# Altium PCB Bottom-PCB.PcbDoc
Units mm, origin at the board's own origin, x right, y up, seen from the top; angles counter-clockwise.
Board outline 55 x 80 mm, 2 copper layers (Top Layer, Bottom Layer); 20 components, 24 nets, 64 pads, 0 vias.
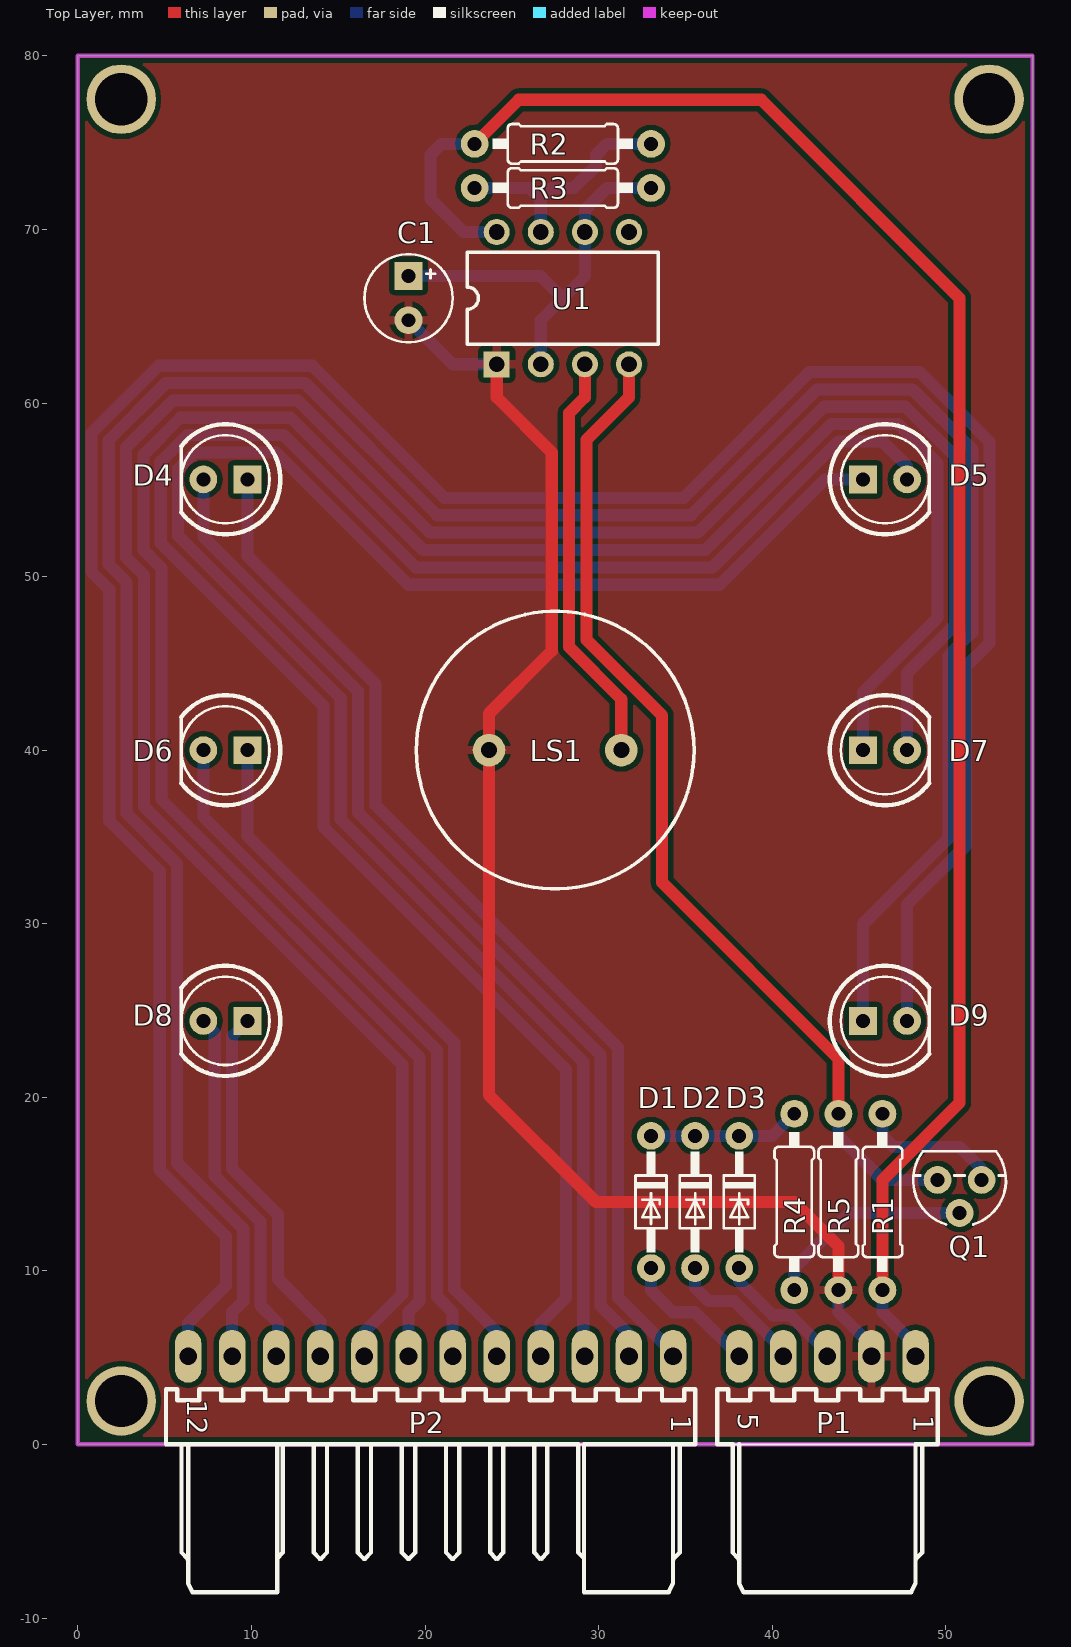
[diagram p0: Top Layer view]
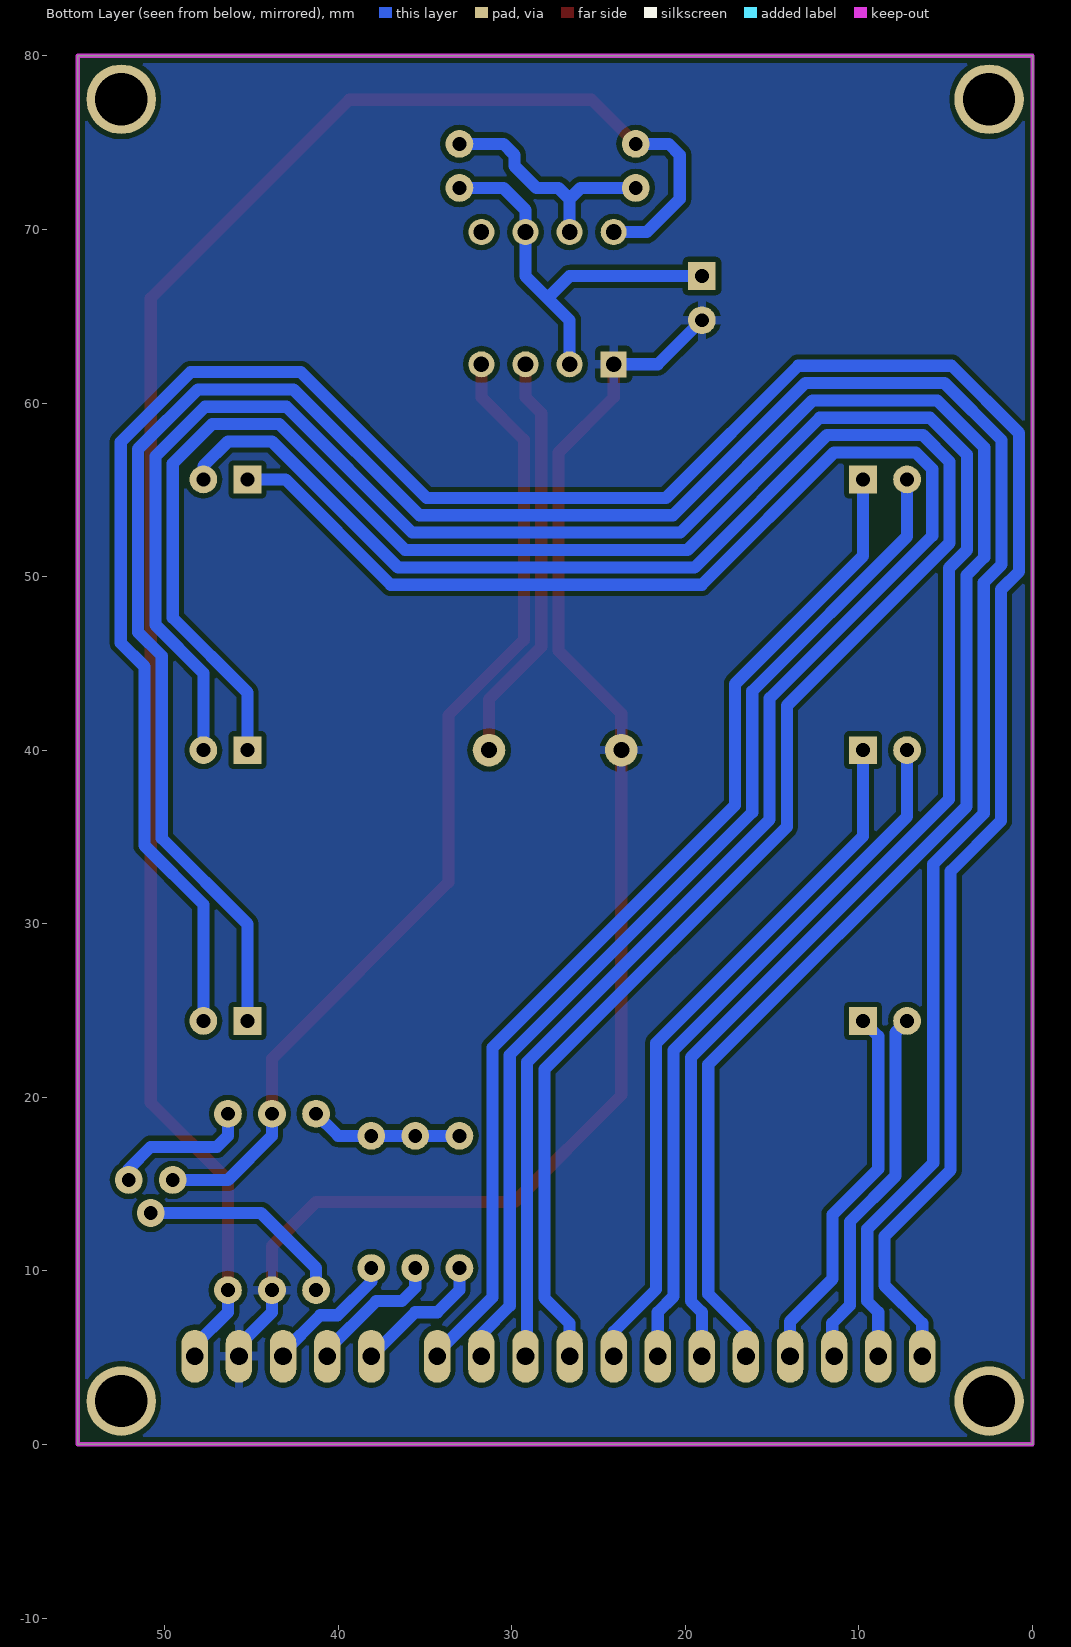
[diagram p1: Bottom Layer view, seen from below]

## Layer stack, top to bottom
Top Solder: solder mask 0.0102, Solder Resist, Dk 3.5
Top Layer: signal copper 0.0356
Dielectric 1: dielectric 0.32, FR-4, Dk 4.8
Bottom Layer: signal copper 0.0356
Bottom Solder: solder mask 0.0102, Solder Resist, Dk 3.5

## Board outline
0,0 55,0 55,80 0,80

## Design rules (kind name [scope] priority, off if disabled: settings)
Clearance Clearance_2 [InNamedPolygon('Bottom Layer-GND')] p1: gap=0.3 ignorepadtopadclearanceinfootprint=FALSE
Clearance Clearance_1 [InNamedPolygon('Top Layer-GND')] p2: gap=0.3 ignorepadtopadclearanceinfootprint=FALSE
Clearance [All] p3: gap=0.3 ignorepadtopadclearanceinfootprint=FALSE
ComponentClearance [All] p1: gap=0 collisioncheckmode=3 verticalgap=0 showdistances=FALSE
PolygonConnect PolygonConnect_2 [All vs IsNamedPolygon('Top Layer-GND')] p1: thpad.connectstyle=Relief thpad.reliefconductorwidth=0.5 thpad.reliefentries=4 thpad.polygonreliefangle="90 Angle" thpad.airgapwidth=0.3 smdpad.connectstyle=Relief smdpad.reliefconductorwidth=0.5 smdpad.reliefentries=4 smdpad.polygonreliefangle="90 Angle" smdpad.airgapwidth=0.3 via.connectstyle=Relief via.reliefconductorwidth=0.254 via.reliefentries=4 via.polygonreliefangle="90 Angle" via.airgapwidth=0.254
PolygonConnect PolygonConnect_1 [All vs IsNamedPolygon('Bottom Layer-GND')] p2: thpad.connectstyle=Relief thpad.reliefconductorwidth=0.5 thpad.reliefentries=4 thpad.polygonreliefangle="90 Angle" thpad.airgapwidth=0.3 smdpad.connectstyle=Relief smdpad.reliefconductorwidth=0.5 smdpad.reliefentries=4 smdpad.polygonreliefangle="90 Angle" smdpad.airgapwidth=0.3 via.connectstyle=Relief via.reliefconductorwidth=0.254 via.reliefentries=4 via.polygonreliefangle="90 Angle" via.airgapwidth=0.254
PolygonConnect [All] p3: connectstyle=Relief reliefconductorwidth=0.254 reliefentries=4 polygonreliefangle="90 Angle" airgapwidth=0.254
RoomDefinition Buzzer [InComponentClass('Buzzer')] p1: confinementstyle=ConfineIn formatcopy=TRUE lockcomponents=FALSE outline 0,-8.89 54.61,-8.89 54.61,80.01 0,80.01
RoutingVias [All] p1: holewidth=0.711 width=1.27 viastyle="Through Hole" minholewidth=0.711 minwidth=1.27 maxholewidth=0.711 maxwidth=1.27
SolderMaskExpansion [All] p1: expansion=0.102
Width [All] p1: maxlimit=1 minlimit=0.5 preferedwidth=0.7
29 further rules are at their usual default settings.

## Components (designator, comment, footprint, x,y, rotation, side; value= is the part's Value field where it differs from the comment)
C1 "10uF" E2,5-5 19.05,66.04 r270 top
D1 "1N4148" DO34Z7 33.02,13.97 r270 top
D2 "1N4148" DO34Z7 35.56,13.97 r270 top
D3 "1N4148" DO34Z7 38.1,13.97 r270 top
D4 "MACHINE_REJECT" LED5MM 8.5,55.6 r180 top
D5 "MACHINE_GOOD" LED5MM 46.5,55.6 r0 top
D6 "WRISTSTRAP_REJECT" LED5MM 8.5,40 r180 top
D7 "WRISTSTRAP_GOOD" LED5MM 46.5,40 r0 top
D8 "TABLE_REJECT" LED5MM 8.5,24.4 r180 top
D9 "TABLE_GOOD" LED5MM 46.5,24.4 r0 top
LS1 "Speaker" BUZZER-16MM 27.5,40 r0 top
P1 "Header 5" 7395-05 43.18,5.08 r0 top
P2 "Header 12" 7395-12 20.32,5.08 r0 top
Q1 "NPN" TO92 50.8,15.24 r180 top
R1 "3K9" 0207/10 46.355,13.97 r270 top
R2 "1K2" 0207/10 27.94,74.93 r180 top
R3 "100K" 0207/10 27.94,72.39 r180 top
R4 "50K" 0207/10 41.275,13.97 r270 top
R5 "1K" 0207/10 43.815,13.97 r90 top
U1 "NE555N" DIP8 27.94,66.04 r0 top

## Footprints (in the part's own frame and the unit in brackets; to place one, negate y for a bottom-side part, rotate by r counter-clockwise, add the part's x,y. Pads: shape width x height; smd on the part's side, far side on the other; paste and mask are expansions set on the pad)
0207/10 [mm]
  round 1.6 hole 0.8: 1(-5.08,0) 2(5.08,0)
  silkscreen extent -4.04,-1.14 4.04,1.14
7395-05 [mil]
  oval 60x120 hole 40: 1(200,0) 2(100,0) 3(0,0) 4(-100,0) 5(-200,0)
  silkscreen extent -250,-535 250,-75
7395-12 [mil]
  oval 60x120 hole 40: 1(550,0) 2(450,0) 3(350,0) 4(250,0) 5(150,0) 6(50,0) 7(-50,0) 8(-150,0) 9(-250,0) 10(-350,0) 11(-450,0) 12(-550,0)
  silkscreen extent -600,-535 600,-75
BUZZER-16MM [mil]
  round 74 hole 36: 1(150,0) 2(-150,0)
  silkscreen extent -315,-315 315,315
DIP8 [mm] "DIP; 8 Leads; Row Spacing 7.62 mm; Pitch 2.54 mm"
  rect 1.5x1.5 hole 0.9: 1(-3.81,-3.81)
  round 1.5 hole 0.9: 2(-1.27,-3.81) 3(1.27,-3.81) 4(3.81,-3.81) 5(3.81,3.81) 6(1.27,3.81) 7(-1.27,3.81) 8(-3.81,3.81)
  silkscreen extent -5.5,-2.65 5.5,2.65
DO34Z7 [mm]
  round 1.6 hole 0.8: 1(3.81,0) 2(-3.81,0)
  silkscreen extent -2.92,-0.89 2.92,0.89
E2,5-5 [mil]
  rect 63x63 hole 31.5: 1(-50,0)
  round 63 hole 31.5: 2(50,0)
  silkscreen extent -100,-100 100,100
LED5MM [mm]
  rect 1.6x1.6 hole 0.8: 1(-1.27,0)
  round 1.6 hole 0.8: 2(1.27,0)
  silkscreen extent -3.17,-3.17 2.54,3.17
TO92 [mm]
  round 1.6 hole 0.8: 1(-1.27,0) 2(0,1.905) 3(1.27,0)
  silkscreen extent -2.67,-1.65 2.68,2.57

## Part data
C1: library part "Cap Pol1", "Polarized Capacitor (Radial)", LatestRevisionDate=17-Jul-2002, LatestRevisionNote="Re-released for DXP Platform.", PackageDescription="Polarized Capacitor (Radial); 2 Leads", PackageReference=RB7.6-15, Published=8-Jun-2000, Publisher="Altium Limited"
D1 D2 D3: library part Diode, "Default Diode", Code_JEDEC=DO-214-AB, LatestRevisionDate=17-Jul-2002, LatestRevisionNote="Re-released for DXP Platform.", PackageDescription="DO-214-AB/SMC; 2 C-Bend Leads; Body 7.9 x 5.9 mm, inc. leads (LxW)", PackageReference=SMC, PackageVersion=Sep-1996, Published=8-Jun-2000, Publisher="Altium Limited"
D4 D5 D6 D7 D8 D9: library part LED0, "Typical INFRARED GaAs LED", LatestRevisionDate=08-Jul-2005, LatestRevisionNote="Mech Layer 1 removed.", PackageDescription="LED; 2 Leads", PackageReference=LED-0, Published=8-Jun-2000, Publisher="Altium Limited"
LS1: "Loudspeaker", LatestRevisionDate=17-Jul-2002, LatestRevisionNote="Re-released for DXP Platform.", PackageReference=PIN2, Published=24-Mar-1999, Publisher="Altium Limited"
P1: "Header, 5-Pin", LatestRevisionDate=17-Jul-2002, LatestRevisionNote="Re-released for DXP Platform.", Publisher="Altium Limited"
P2: "Header, 12-Pin", LatestRevisionDate=17-Jul-2002, LatestRevisionNote="Re-released for DXP Platform.", Publisher="Altium Limited"
Q1: "NPN Bipolar Transistor", Code_JEDEC=TO-226-AA, LatestRevisionDate=17-Jul-2002, LatestRevisionNote="Re-released for DXP Platform.", PackageDescription="TO, Flat Index; 3 In-Line, Axial Leads; Body Dia. 4.8mm; Leads 0.55 x 0.51 mm (max)", PackageReference=TO-226-AA, Published=8-Jun-2000, Publisher="Altium Limited"
R1 R2 R3 R4 R5: library part Res1, "Resistor", LatestRevisionDate=17-Jul-2002, LatestRevisionNote="Re-released for DXP Platform.", PackageDescription="Axial Device, Thru-Hole; 2 Leads; 0.3 in Pin Spacing", PackageReference=AXIAL-0.3, Published=8-Jun-2000, Publisher="Altium Limited"
U1: "General-Purpose Single Bipolar Timer", Code_JEDEC=MO-001-AN, ComponentLink1Description="Manufacturer Link", ComponentLink1URL=http://www.st.com/, ComponentLink2Description=Datasheet, ComponentLink2URL=http://www.st.com/stonline/products/literature/ds/2182/ne555.pdf, DatasheetVersion=Jul-1998, LatestRevisionDate=06-Jun-2005, LatestRevisionNote="Stylized 3D Model Added.", PackageDescription="DIP; 8 Leads; Row Spacing 7.62 mm; Pitch 2.54 mm", PackageReference=DIP8, Published=24-Aug-2001, Publisher="Altium Limited"

## Free pads (board coordinates)
  round 4 hole 3: 2(52.5,2.5) 3(2.5,2.5) 4(2.5,77.5) 5(52.5,77.5)

## Nets (pads, with @x,y where several pads share a name; then routed paths per layer and width w, separated by ;. In a path a pad name is that pad's centre, name@x,y a point inside that pad or via, vN(x,y) a via of type N, cw(c..) or ccw(c..) an arc to the next point about the centre after c; other vN are vias at no path point)
15V: P1.1 R1.2 R2.2 U1.8 | length 107.3
  Top Layer w0.7: R2.2 25.4,77.47 39.37,77.47 50.8,66.04 50.8,19.685 46.355,15.24 R1.2
  Bottom Layer w0.7: R2.2 20.955,74.93 20.32,74.295 20.32,71.755 22.225,69.85 U1.8 ; R1.2 46.355,7.62 48.26,5.715 P1.1
GND: C1.2 LS1.2 P1.2 R5.1 U1.1 | length 81.9
  Top Layer w0.7: U1.1 24.13,60.325 27.305,57.15 27.305,45.72 23.69,42.105 LS1.2 23.69,20.125 29.845,13.97 41.275,13.97 43.815,11.43 R5.1
  Bottom Layer w0.7: C1.2 21.59,62.23 U1.1 ; R5.1 43.815,7.62 45.72,5.715 P1.2
M_G_A: D5.1 P2.3 | length 106.3
  Bottom Layer w0.7: P2.3 29.115,5.175 29.115,22.032 15.145,36.002 15.145,42.987 5.777,52.355 5.777,56.198 6.729,57.15 11.43,57.15 19.05,49.53 36.974,49.53 43.044,55.6 D5.1
M_G_K: D5.2 P2.4 | length 112.9
  Bottom Layer w0.7: P2.4 26.67,6.985 28.115,8.43 28.115,21.617 14.145,35.587 14.145,42.572 4.777,51.94 4.777,56.612 6.315,58.15 11.844,58.15 19.464,50.53 36.56,50.53 43.815,57.785 46.355,57.785 47.77,56.37 D5.2
M_R_A: D4.1 P2.1 | length 60.7
  Bottom Layer w0.7: D4.1 9.77,51.19 17.145,43.815 17.145,36.83 31.115,22.86 31.115,8.474 34.29,5.299 P2.1
M_R_K: D4.2 P2.2 | length 60.7
  Bottom Layer w0.7: D4.2 7.23,52.316 16.145,43.401 16.145,36.416 30.115,22.446 30.115,7.985 31.75,6.35 P2.2
MACHINE: D2.1 P1.4 | length 8
  Bottom Layer w0.7: D2.1 35.56,9.034 36.339,8.255 37.81,8.255 40.64,5.425 P1.4
NetC1_1: C1.1 R3.1 U1.2 U1.6 | length 23.7
  Bottom Layer w0.7: C1.1 26.67,67.31 27.94,66.04 ; U1.2 26.67,64.77 27.94,66.04 ; R3.1 30.48,72.39 29.21,71.12 U1.6 29.21,67.31 27.94,66.04
NetD1_2: D1.2 D2.2 D3.2 R4.1 | length 8.8
  Bottom Layer w0.7: D1.2 D2.2 D3.2 40.005,17.78 R4.1
NetLS1_1: LS1.1 U1.3 | length 23.8
  Top Layer w0.7: U1.3 29.21,60.325 28.305,59.42 28.305,45.941 31.31,42.936 LS1.1
NetQ1_1: Q1.1 R1.1 | length 8.4
  Bottom Layer w0.7: R1.1 46.355,17.78 46.99,17.145 50.8,17.145 52.07,15.875 Q1.1
NetQ1_2: Q1.2 R4.2 | length 12.1
  Bottom Layer w0.7: R4.2 41.275,10.16 44.45,13.335 Q1.2
NetQ1_3: Q1.3 R5.2 U1.4 | length 58.2
  Top Layer w0.7: U1.4 31.75,60.325 29.305,57.88 29.305,46.355 33.655,42.005 33.655,32.385 43.815,22.225 R5.2
  Bottom Layer w0.7: R5.2 43.815,17.78 46.355,15.24 Q1.3
NetR2_1: R2.1 R3.2 U1.7 | length 14
  Bottom Layer w0.7: R3.2 26.035,72.39 26.67,71.755 ; U1.7 26.67,71.755 ; R2.1 30.48,74.93 29.845,74.295 29.845,73.66 28.575,72.39 27.305,72.39 26.67,71.755
T_G_A: D9.1 P2.11 | length 150.5
  Bottom Layer w0.7: P2.11 8.89,7.62 9.525,8.255 9.525,12.412 5.715,16.222 5.715,33.44 2.81,36.345 2.81,49.665 1.777,50.698 1.777,57.854 5.073,61.15 13.087,61.15 20.707,53.53 35.317,53.53 42.572,60.785 48.088,60.785 51.53,57.343 51.53,46.797 50.165,45.432 50.165,34.925 45.23,29.99 D9.1
T_G_K: D9.2 P2.12 | length 153.8
  Bottom Layer w0.7: P2.12 6.35,6.985 8.525,9.16 8.525,11.997 4.715,15.807 4.715,33.026 1.81,35.931 1.81,49.251 0.777,50.284 0.777,58.269 4.658,62.15 13.501,62.15 21.121,54.53 34.903,54.53 42.158,61.785 48.503,61.785 52.53,57.758 52.53,46.18 51.165,44.815 51.165,34.511 47.77,31.116 D9.2
T_R_A: D8.1 P2.9 | length 21.8
  Bottom Layer w0.7: D8.1 8.89,23.52 8.89,15.875 11.525,13.24 11.525,9.525 13.97,7.08 P2.9
T_R_K: D8.2 P2.10 | length 21.1
  Bottom Layer w0.7: D8.2 7.89,23.74 7.89,15.461 10.525,12.826 10.525,7.999 11.539,6.985 11.539,5.189 P2.10
TABLE: D3.1 P1.3 | length 7.8
  Bottom Layer w0.7: D3.1 38.1,9.379 40.039,7.44 41.039,7.44 43.18,5.299 P1.3
W_G_A: D7.1 P2.7 | length 130.8
  Bottom Layer w0.7: P2.7 19.05,7.62 19.685,8.255 19.685,22.299 4.81,37.174 4.81,50.493 3.777,51.526 3.777,57.026 5.901,59.15 12.258,59.15 19.878,51.53 36.146,51.53 43.401,58.785 47.26,58.785 49.53,56.515 49.53,47.625 45.23,43.325 D7.1
W_G_K: D7.2 P2.8 | length 134.1
  Bottom Layer w0.7: P2.8 16.51,6.494 18.685,8.669 18.685,21.884 3.81,36.759 3.81,50.079 2.777,51.112 2.777,57.44 5.487,60.15 12.673,60.15 20.293,52.53 35.732,52.53 42.987,59.785 47.674,59.785 50.53,56.929 50.53,47.211 47.77,44.451 D7.2
W_R_A: D6.1 P2.5 | length 40.9
  Bottom Layer w0.7: D6.1 9.77,35.042 21.685,23.127 21.685,8.939 24.13,6.494 P2.5
W_R_K: D6.2 P2.6 | length 40.9
  Bottom Layer w0.7: D6.2 7.23,36.168 20.685,22.713 20.685,8.525 21.59,7.62 P2.6
WRISTSTRAP: D1.1 P1.5 | length 7.9
  Bottom Layer w0.7: D1.1 33.02,8.89 34.29,7.62 35.56,7.62 P1.5
pads on no net: U1.5

## Polygon pours and split planes (outlines as drawn)
GND on Bottom Layer "Bottom Layer-GND" (solid, remove dead copper, pour order 0): 0,0 55,0 55,80 0,80
GND on Top Layer "Top Layer-GND" (solid, remove dead copper, pour order 2): 0,0 55,0 55,80 0,80

## Keep-outs
Keep-Out Layer:
  the board outline again, w0.254

## Text inside footprints (layer, text, board x,y; h text height)
LS1: Mechanical 16 "+" at 30.167,41.143 h2.76
P1: Top Overlay "1" at 47.777,1.678 h1.97 r270; Top Overlay "5" at 37.667,1.805 h1.97 r270
P2: Top Overlay "1" at 33.807,1.678 h1.97 r270; Top Overlay "12" at 5.917,2.567 h1.97 r270